# EAGLE board schematics1 (EAGLE 6.1)
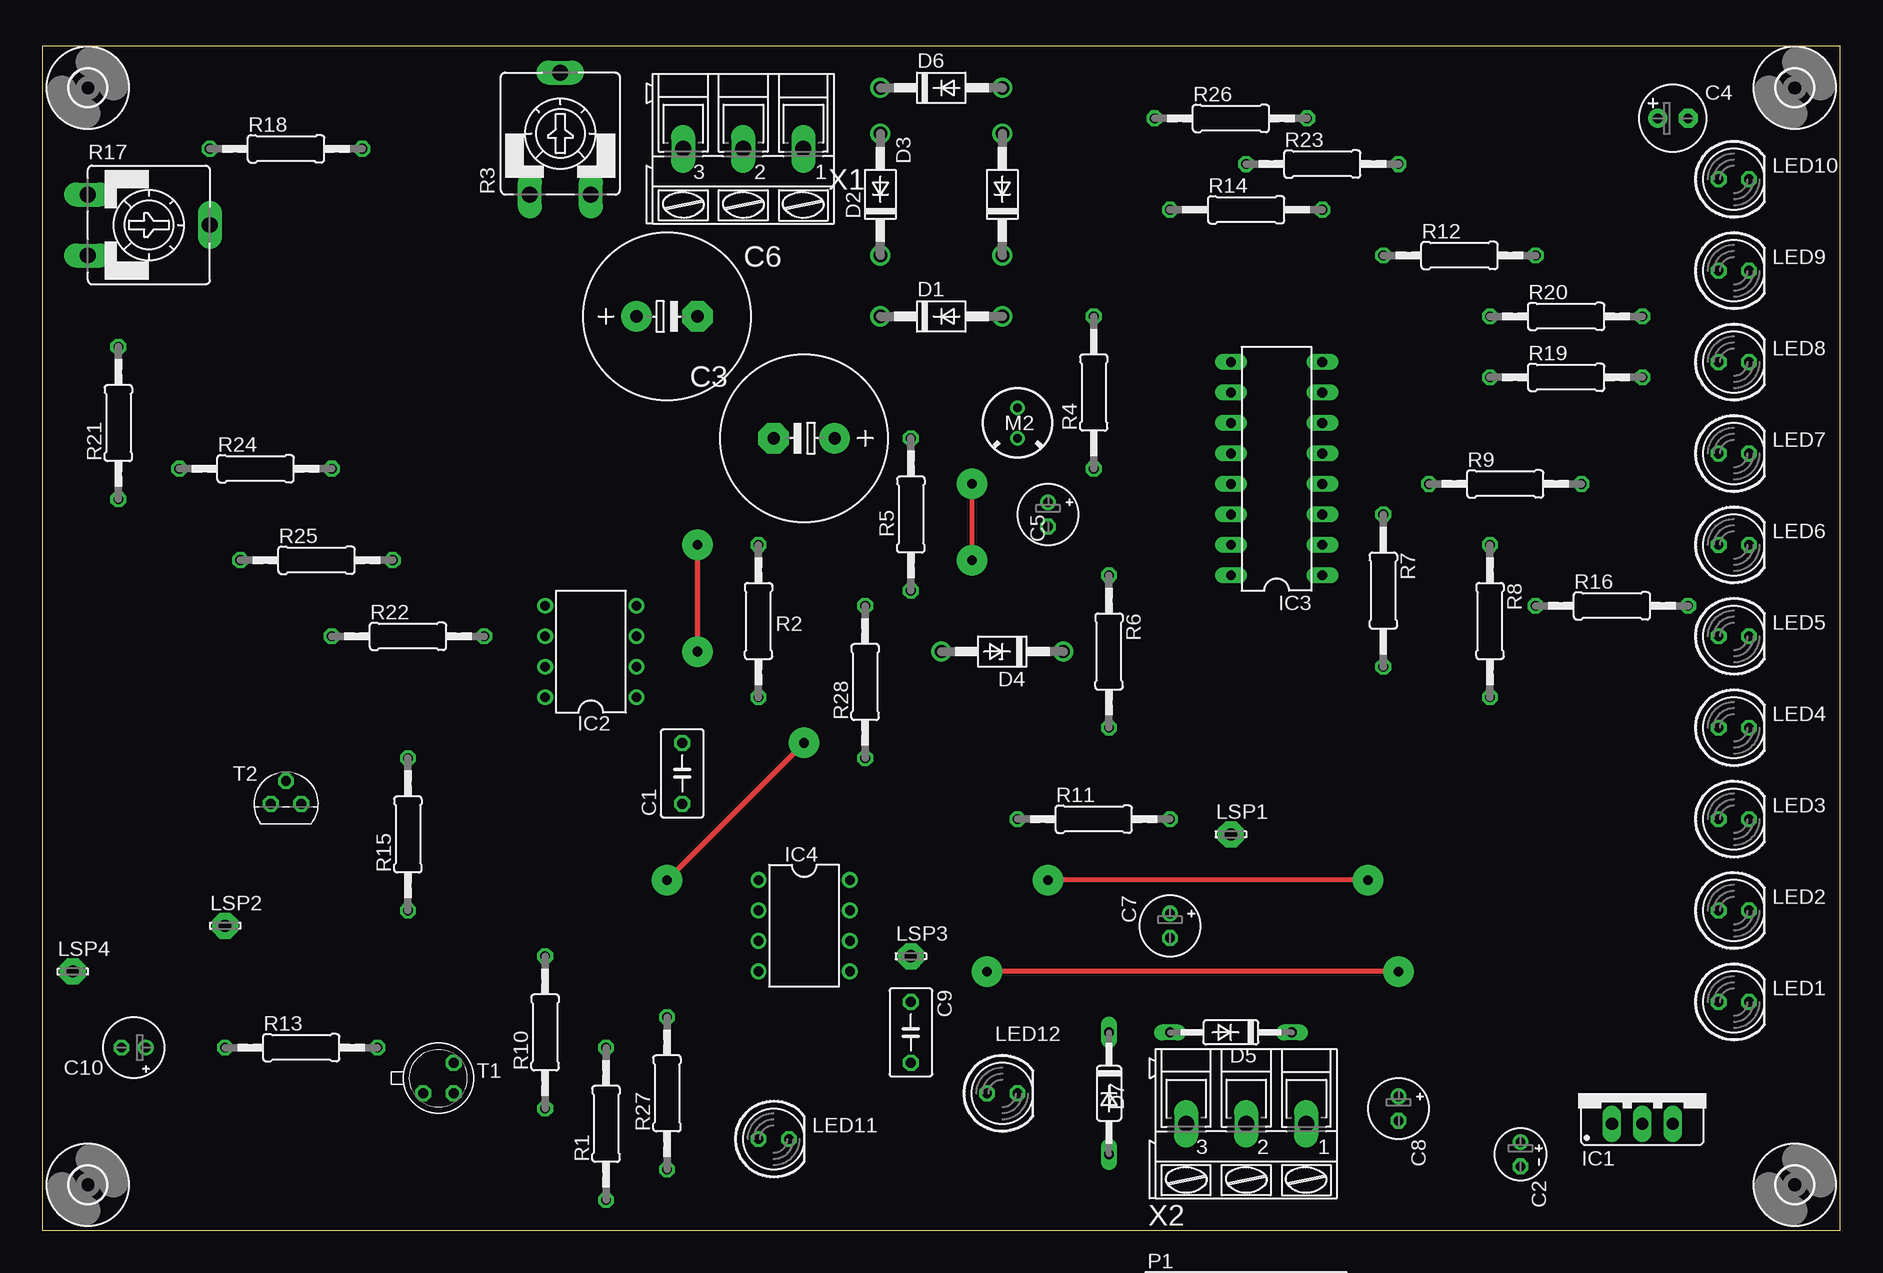
[diagram p0: board, top side]
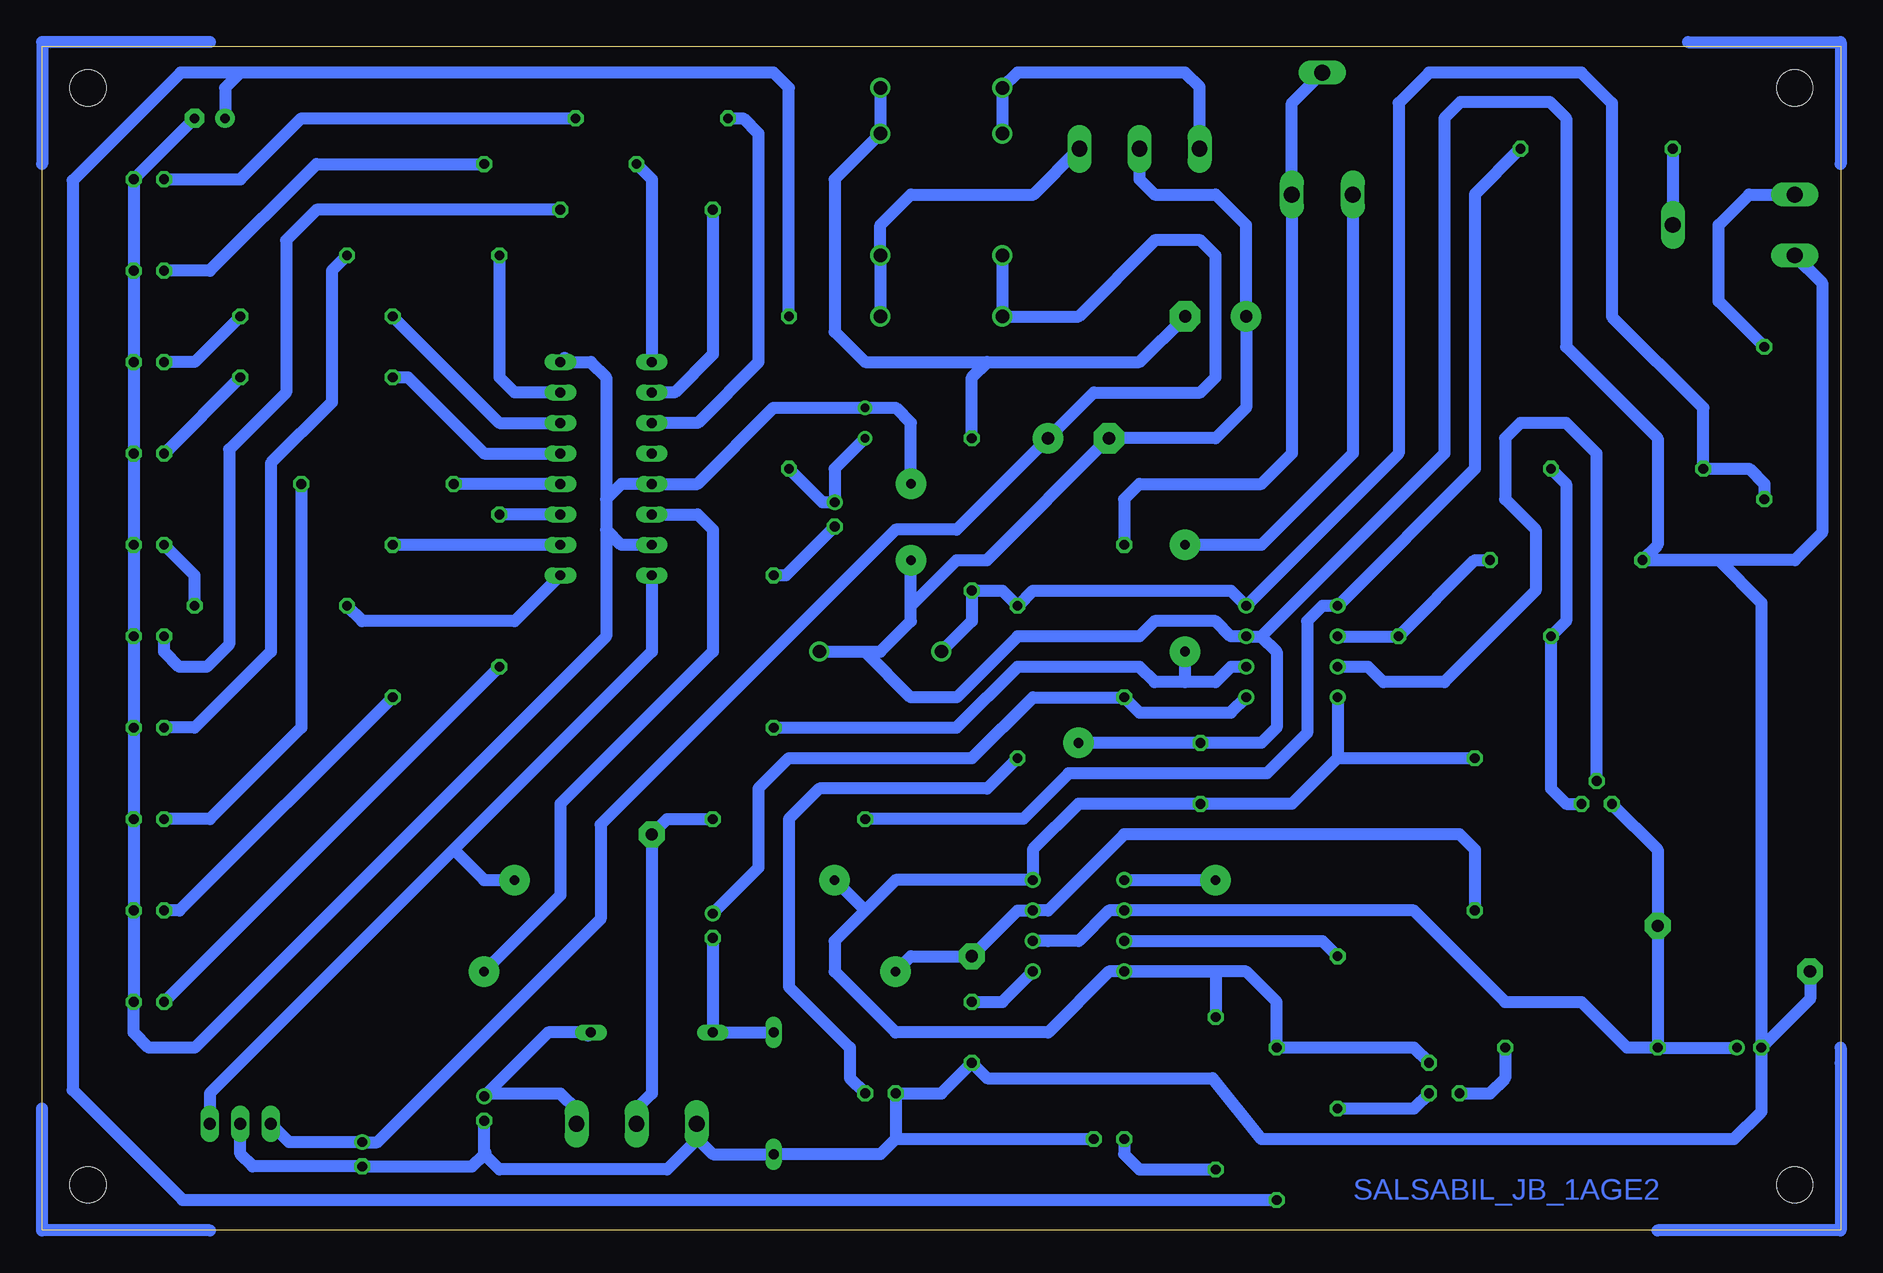
[diagram p1: board, bottom side, seen from below]

Size 149.84 x 98.73 mm. Coordinates in mm from the lower left corner, seen from the top.
Outline: 0,0 149.84,0 149.84,98.73 0,98.73 0,0
Copper layers (1*16): Top 0.035mm / dielectric 1.5mm / Bottom 0.035mm
Design rules: minimum track width 10mil, minimum drill 24mil, track to track 8mil, track to pad 8mil, pad to pad 8mil, via to via 8mil, smd to smd 8mil, copper to edge 40mil, drill to drill 8mil, minimum pad ring 10mil, minimum via ring 8mil, stop-mask expansion 4mil, vias tented up to drill 0mil, thermal gap 10mil

## Footprints (pad centres in the part's own frame; a part is rotated, then mirrored left to right if it is on the bottom)
C050-035X075 = drill 0.813 octagon: 1 -2.54,0; 2 2.54,0
E2-4 = drill 0.813 pad 1.27: + -1.016,0 | drill 0.813 pad 1.27 octagon: - 1.016,0
E5-13 = drill 1.016 pad 2.54: + -2.54,0 | drill 1.016 pad 2.54 octagon: - 2.54,0
E2,5-6 = drill 0.813 pad 1.6: + -1.27,0 | drill 0.813 pad 1.6 octagon: - 1.27,0
E2-5 = drill 0.813 pad 1.27: + -1.016,0 | drill 0.813 pad 1.27 octagon: - 1.016,0
DO41-10 = drill 1.118: A 5.08,0; C -5.08,0
DO41Z10 = drill 1.118: A 5.08,0; C -5.08,0
DO35-10 = drill 0.813 long: A 5.08,0; C -5.08,0
78XXS = drill 1.016 long: GND 0,-2.54; IN -2.54,-2.54; OUT 2.54,-2.54
DIL08 = drill 0.813 pad 1.27: 1 -3.81,-3.81; 2 -1.27,-3.81; 3 1.27,-3.81; 4 3.81,-3.81; 5 3.81,3.81; 6 1.27,3.81; 7 -1.27,3.81; 8 -3.81,3.81
DIL16 = drill 0.813 long: 1 -8.89,-3.81; 2 -6.35,-3.81; 3 -3.81,-3.81; 4 -1.27,-3.81; 5 1.27,-3.81; 6 3.81,-3.81; 7 6.35,-3.81; 8 8.89,-3.81; 9 8.89,3.81; 10 6.35,3.81; 11 3.81,3.81; 12 1.27,3.81; 13 -1.27,3.81; 14 -3.81,3.81; 15 -6.35,3.81; 16 -8.89,3.81
LED5MM = drill 0.813 octagon: A -1.27,0; K 1.27,0
LSP10 = drill 1.016 pad 2.159 octagon: MP 0,0
F6050AP = drill 0.7 pad 1.2: 1 0,1.27; 2 0,-1.27
3RP/1610N = drill 1.2 pad 2.184: 1 -5,0; 2 0,0; 3 5,0
0207/12 = drill 0.813 octagon: 1 -6.35,0; 2 6.35,0
CA9V = drill 1.321 long: A -2.54,-5.08; E 2.54,-5.08; S 0,5.08
TO18 = drill 0.813 octagon: 1 -1.27,-1.27; 2 1.27,-1.27; 3 1.27,1.27
TO92 = drill 0.813 octagon: 1 1.27,0; 2 0,1.905; 3 -1.27,0
3,0 = hole 3: 0,0
AK300/3 = drill 1.321 long: 1 -5.004,0; 2 0,0; 3 5.004,0

## Placement (x,y rotation side)
C1  100n  [C050-035X075]  53.34,38.1 90 top
C2  1µ  [E2-4]  123.19,6.35 270 top
C3  1000µ  [E5-13]  63.5,66.04 180 top
C4  100µ  [E2,5-6]  135.89,92.71 0 top
C5  10µ  [E2-5]  83.82,59.69 270 top
C6  1000µ  [E5-13]  52.07,76.2 0 top
C7  10µ  [E2-5]  93.98,25.4 270 top
C8  2.2µ  [E2-5]  113.03,10.16 270 top
C9  10n  [C050-035X075]  72.39,16.51 270 top
C10  10µ  [E2-5]  7.62,15.24 180 top
D1  1N4004  [DO41-10]  74.93,76.2 0 top
D2  1N4004  [DO41-10]  69.85,86.36 90 top
D3  1N4004  [DO41-10]  80.01,86.36 90 top
D4  BZX85  [DO41Z10]  80.01,48.26 180 top
D5  1N4148DO35-10  [DO35-10]  99.06,16.51 180 top
D6  1N4004  [DO41-10]  74.93,95.25 0 top
D7  1N4148DO35-10  [DO35-10]  88.9,11.43 270 top
IC1  [78XXS]  133.35,11.43 0 top
IC2  LM358N  [DIL08]  45.72,48.26 90 top
IC3  4017N  [DIL16]  102.87,63.5 90 top
IC4  NE555N  [DIL08]  63.5,25.4 270 top
LED1  R  [LED5MM]  140.97,19.05 0 top
LED2  J  [LED5MM]  140.97,26.67 0 top
LED3  V  [LED5MM]  140.97,34.29 0 top
LED4  B  [LED5MM]  140.97,41.91 0 top
LED5  R  [LED5MM]  140.97,49.53 0 top
LED6  J  [LED5MM]  140.97,57.15 0 top
LED7  V  [LED5MM]  140.97,64.77 0 top
LED8  B  [LED5MM]  140.97,72.39 0 top
LED9  R  [LED5MM]  140.97,80.01 0 top
LED10  J  [LED5MM]  140.97,87.63 0 top
LED11  V  [LED5MM]  60.96,7.62 0 top
LED12  V  [LED5MM]  80.01,11.43 0 top
LSP1  LSP10  [LSP10]  99.06,33.02 0 top
LSP2  LSP10  [LSP10]  15.24,25.4 0 top
LSP3  LSP10  [LSP10]  72.39,22.86 0 top
LSP4  LSP10  [LSP10]  2.54,21.59 0 top
M2  ELECTRET_MICROPHON-F6050AP  [F6050AP]  81.28,67.31 0 top
P1  10K  [3RP/1610N]  100.33,-8.89 0 top  (outside the outline)
R1  4K7  [0207/12]  46.99,8.89 90 top
R2  47K  [0207/12]  59.69,50.8 270 top
R3  1M  [CA9V]  43.18,91.44 0 top
R4  2K2  [0207/12]  87.63,69.85 90 top
R5  150  [0207/12]  72.39,59.69 90 top
R6  1K  [0207/12]  88.9,48.26 270 top
R7  1K  [0207/12]  111.76,53.34 270 top
R8  1K  [0207/12]  120.65,50.8 270 top
R9  1K  [0207/12]  121.92,62.23 0 top
R10  1K  [0207/12]  41.91,16.51 90 top
R11  470K  [0207/12]  87.63,34.29 0 top
R12  1K  [0207/12]  118.11,81.28 0 top
R13  15  [0207/12]  21.59,15.24 0 top
R14  1K  [0207/12]  100.33,85.09 0 top
R15  10K  [0207/12]  30.48,33.02 90 top
R16  1K  [0207/12]  130.81,52.07 0 top
R17  10K  [CA9V]  8.89,83.82 270 top
R18  470K  [0207/12]  20.32,90.17 0 top
R19  1K  [0207/12]  127,71.12 0 top
R20  1K  [0207/12]  127,76.2 0 top
R21  2K2  [0207/12]  6.35,67.31 90 top
R22  470K  [0207/12]  30.48,49.53 0 top
R23  1K  [0207/12]  106.68,88.9 0 top
R24  33K  [0207/12]  17.78,63.5 0 top
R25  470K  [0207/12]  22.86,55.88 0 top
R26  1K  [0207/12]  99.06,92.71 0 top
R27  1K  [0207/12]  52.07,11.43 90 top
R28  1K  [0207/12]  68.58,45.72 90 top
T1  2N2222  [TO18]  33.02,12.7 0 top
T2  BC547  [TO92]  20.32,35.56 0 top
U$1  [3,0]  3.81,95.25 0 top
U$2  [3,0]  146.05,95.25 0 top
U$3  [3,0]  146.05,3.81 0 top
U$4  [3,0]  3.81,3.81 0 top
X1  [AK300/3]  58.42,90.17 180 top
X2  [AK300/3]  100.33,8.89 180 top

## Library data of the parts
C1-C10 R1 R2 R4-R16 R18-R28 = rcl
D1-D7 = diode
IC1 = v-reg
IC2 IC4 = linear
IC3 = 40xx
LED1-LED12 = led
LSP1-LSP4 = solpad
M2 = microphon
P1 R3 R17 = pot
T1 T2 = transistor
U$1-U$4 = holes
X1 X2 = con-ptr500; OC_FARNELL: unknown; OC_NEWARK: unknown

## Nets
+12V: C1.1 IC1.OUT IC2.8 IC3.16 IC4.4 IC4.8 R1.2 R15.2 R27.2 T1.3
-12V: D4.A IC2.4 R5.1 R21.1 R24.1 R28.2
GND: C1.2 C2.- C3.- C4.- C6.+ C8.- C9.2 C10.- D4.C D7.A IC1.GND IC2.3 IC3.8 IC3.13 IC3.15 IC4.1 LED1.K LED2.K LED3.K LED4.K LED5.K LED6.K LED7.K LED8.K LED9.K LED10.K LED11.K LED12.A LSP4.MP M2.1 R17.E R25.1 X1.2 X2.3
N$1: LED1.A R7.2
N$2: LED2.A R8.2
N$3: LED3.A R9.2
N$4: LED4.A R12.2
N$5: LED5.A R14.2
N$6: LED6.A R16.2
N$7: LED7.A R19.2
N$8: LED8.A R20.2
N$9: LED9.A R23.2
N$10: LED10.A R26.2
N$11: IC3.3 R7.1
N$12: IC3.2 R8.1
N$13: IC3.4 R9.1
N$14: IC3.7 R12.1
N$15: IC3.10 R14.1
N$16: IC3.1 R16.1
N$17: IC3.5 R19.1
N$18: IC3.6 R20.1
N$19: IC3.9 R23.1
N$20: IC3.11 R26.1
N$21: LSP1.MP R11.2 X2.2
N$22: IC2.5 R11.1 R18.2
N$23: R17.A R21.2
N$24: IC2.6 R22.2 R25.2
N$25: R22.1 R24.2 T2.1
N$26: C5.+ M2.2 R4.1
N$27: C4.+ R1.1 R4.2
N$28: C5.- R6.1
N$29: IC2.2 R3.A R6.2
N$30: R2.1 R3.E R3.S
N$31: C7.+ IC2.1 R2.2
N$32: C8.+ D5.C X2.1
N$33: P1.3
N$34: C7.- D5.A D7.C
N$35: P1.2
N$36: P1.1
N$37: IC2.7 T2.2
N$38: R17.S R18.1
N$39: C10.+ IC4.2 IC4.6 LSP2.MP R13.1 T2.3
N$40: C9.1 IC4.5
N$41: R13.2 T1.1
N$42: R10.1 T1.2
N$43: IC4.3 R10.2
N$44: IC3.14 IC4.7 LSP3.MP R15.1
N$45: D1.A D3.C X1.1
N$46: D2.A D6.C X1.3
N$47: LED11.A R27.1
N$48: C2.+ C3.+ D1.C D2.C IC1.IN
N$49: C6.- D3.A D6.A R5.2
N$50: LED12.K R28.1

## Tracks (layer width: path | path; a pad name or v marks a point on that pad's centre or on a via)
+12V  (via drill 0.8 pad 2.54)
  Top 0.406: v110.49,29.21 v83.82,29.21
  Bottom 1.016: T1.3 35.56,15.24 R1.2 46.99,19.05 49.53,21.59 IC4.4 | 41.91,39.37 R15.2 | IC2.8 41.91,39.37 | 41.91,39.37 45.72,35.56 C1.1 63.5,35.56 67.31,31.75 IC4.8 78.74,29.21 81.28,26.67 | IC4.4 52.07,21.59 R27.2 | IC4.4 60.96,21.59 66.04,16.51 78.74,16.51 83.82,21.59 83.82,24.13 81.28,26.67 | IC1.OUT 135.89,11.43 115.57,31.75 | IC3.16 99.06,48.26 115.57,31.75 | 115.57,31.75 113.03,29.21 v110.49,29.21 | v83.82,29.21 81.28,26.67
-12V
  Bottom 1.016: D4.A 72.39,50.8 R5.1 69.85,53.34 R28.2 67.31,53.34 50.8,53.34 IC2.4 36.83,64.77 36.83,93.98 34.29,96.52 21.59,96.52 19.05,93.98 19.05,76.2 11.43,68.58 R24.1 7.62,63.5 6.35,62.23 R21.1
GND  (via drill 0.8 pad 2.54)
  Top 0.406: v63.5,40.64 v52.07,29.21 | v77.47,62.23 v77.47,55.88
  Bottom 1.016: R25.1 10.16,55.88 6.6,52.32 C10.- | LSP4.MP 2.54,19.3 C10.- | C8.- 113.03,6.6 112.9,6.48 113.03,6.35 | C10.- 6.6,9.91 8.89,7.62 48.26,7.62 52.32,12.7 71.12,12.7 C9.2 74.93,11.43 LED12.A 78.74,7.62 | 113.03,6.35 114.05,5.33 C2.- 132.33,5.33 133.35,6.35 IC1.GND | 113.03,6.35 111.76,5.08 97.79,5.08 95.33,7.54 X2.3 95.33,7.7 93.98,6.35 D7.A 80.01,6.35 78.74,7.62 | 78.74,7.62 LED11.K | v63.5,40.64 C1.2 48.26,40.64 46.99,41.91 46.99,48.26 48.26,49.53 | R25.1 3.81,55.88 1.52,58.17 1.52,78.99 R17.E | X1.2 58.42,87.63 57.15,86.36 52.07,86.36 49.53,83.82 C6.+ 49.53,68.58 52.07,66.04 C3.- 71.12,55.88 73.66,55.88 77.47,52.07 | R25.1 15.24,57.15 15.24,66.04 22.86,73.66 22.86,92.71 24.23,94.08 31.65,94.08 33.02,92.71 33.02,64.77 48.26,49.53 | D4.C 81.28,48.26 | 81.28,48.26 80.01,48.26 77.47,50.8 77.47,52.07 | 81.28,48.26 77.47,44.45 73.66,44.45 68.58,49.53 58.42,49.53 57.15,50.8 52.07,50.8 50.8,49.53 IC2.3 48.26,49.53 | IC4.1 v52.07,29.21 | C4.- LED10.K LED9.K LED8.K LED7.K LED6.K LED5.K LED4.K LED3.K LED2.K LED1.K 142.24,16.51 140.97,15.24 137.16,15.24 102.87,49.53 102.87,58.42 | 100.33,57.15 IC3.15 101.6,57.15 102.87,58.42 | 106.34,72.72 IC3.8 104.14,72.39 102.87,71.12 102.87,60.96 | 102.87,60.96 102.87,58.42 | 102.87,60.96 101.6,62.23 IC3.13 95.25,62.23 88.9,68.58 M2.1 78.74,68.58 77.47,67.31 v77.47,62.23 | 77.47,52.07 v77.47,55.88
N$1
  Bottom 1.016: R7.2 LED1.A
N$2
  Bottom 1.016: R8.2 138.43,26.67 LED2.A
N$3
  Bottom 1.016: LED3.A 135.89,34.29 128.27,41.91 R9.2
N$4
  Bottom 1.016: LED4.A 137.16,41.91 130.81,48.26 130.81,63.95 125.73,69.03 125.73,80.01 R12.2
N$5
  Bottom 1.016: LED5.A 139.7,48.26 138.43,46.99 136.16,46.99 134.28,48.87 134.28,65.11 129.54,69.85 129.54,82.55 127,85.09 R14.2
N$6
  Bottom 1.016: LED6.A 137.16,54.61 R16.2
N$7
  Bottom 1.016: R19.2 LED7.A
N$8
  Bottom 1.016: R20.2 137.16,72.39 LED8.A
N$9
  Bottom 1.016: R23.2 127,88.9 135.89,80.01 LED9.A
N$10
  Bottom 1.016: LED10.A 133.35,87.63 128.27,92.71 R26.2
N$11
  Bottom 1.016: IC3.3 R7.1
N$12
  Bottom 1.016: IC3.2 R8.1
N$13
  Bottom 1.016: IC3.4 R9.1
N$14
  Bottom 1.016: IC3.7 110.49,69.85 111.76,71.12 R12.1
N$15
  Bottom 1.016: IC3.10 97.17,69.85 93.98,73.04 R14.1
N$16
  Bottom 1.016: IC3.1 110.49,50.8 123.19,50.8 R16.1
N$17
  Bottom 1.016: IC3.5 113.03,64.77 119.38,71.12 R19.1
N$18
  Bottom 1.016: R20.1 111.76,67.31 IC3.6
N$19
  Bottom 1.016: R23.1 99.06,87.63 IC3.9
N$20
  Bottom 1.016: R26.1 91.44,92.71 90.17,91.44 90.17,72.39 95.25,67.31 IC3.11
N$21
  Bottom 1.016: R11.2 97.79,34.29 LSP1.MP 99.06,11.43 100.33,10.16 X2.2
N$22
  Bottom 1.016: R18.2 30.48,86.36 30.48,63.5 IC2.5 43.18,52.07 44.45,50.8 44.45,41.46 47.81,38.1 64.32,38.1 68.08,34.34 81.23,34.34 R11.1
N$23
  Bottom 1.016: R21.2 10.16,77.47 10.16,83.82 7.62,86.36 R17.A
N$24
  Bottom 1.016: R25.2 30.48,55.88 R22.2 IC2.6
N$25
  Bottom 1.016: R24.2 22.86,62.23 22.86,50.8 R22.1 24.13,36.83 22.86,35.56 T2.1
N$26
  Bottom 1.016: R4.1 84.84,60.71 C5.+ 83.82,63.5 M2.2
N$27
  Bottom 1.016: R1.1 138.16,2.54 147.32,11.7 147.32,87.51 138.31,96.52 133.35,96.52 | 133.35,96.52 88.9,96.52 87.63,95.25 R4.2 | 133.35,96.52 134.62,95.25 C4.+
N$28
  Bottom 1.016: C5.- 87.88,54.61 R6.1
N$29  (via drill 0.8 pad 2.54)
  Top 0.406: v54.61,48.26 v54.61,57.15
  Bottom 1.016: R6.2 73.66,41.91 68.58,46.99 58.42,46.99 57.15,45.72 54.61,45.72 | R3.A 40.64,64.77 48.26,57.15 v54.61,57.15 | IC2.2 50.8,46.99 52.07,45.72 54.61,45.72 | 54.61,45.72 v54.61,48.26
N$30
  Bottom 1.016: R3.S 45.72,93.98 R3.E 45.72,64.77 48.26,62.23 58.42,62.23 59.69,60.96 R2.1
N$31
  Bottom 1.016: C7.+ 90.17,30.23 90.17,36.83 87.63,39.37 72.39,39.37 67.31,44.45 R2.2 58.42,43.18 50.8,43.18 IC2.1
N$32
  Bottom 1.016: 104.39,16.26 D5.C 107.7,16.51 C8.+ 112.78,11.43 106.68,11.43 105.33,10.08 X2.1
N$34
  Bottom 1.016: D7.C D5.A C7.-
N$37
  Bottom 1.016: IC2.7 39.37,46.99 38.1,45.72 33.02,45.72 25.4,53.34 25.4,58.42 27.94,60.96 27.94,66.04 26.67,67.31 22.86,67.31 20.32,64.77 T2.2
N$38
  Bottom 1.016: R18.1 R17.S
N$39
  Bottom 1.016: 66.04,24.13 IC4.6 63.5,24.13 60.96,26.67 IC4.2 35.56,26.67 27.94,19.05 21.59,19.05 17.78,15.24 R13.1 | R13.1 C10.+ | R13.1 LSP2.MP 15.24,31.75 T2.3
N$40
  Bottom 1.016: C9.1 69.85,19.05 IC4.5
N$41
  Bottom 1.016: T1.1 29.21,11.43 27.94,12.7 R13.2
N$42
  Bottom 1.016: R10.1 35.56,10.16 T1.2
N$43
  Bottom 1.016: IC4.3 43.18,24.13 R10.2
N$44  (via drill 0.8 pad 2.54)
  Top 0.406: v113.03,21.59 v78.74,21.59
  Bottom 1.016: IC3.14 95.25,59.69 93.98,58.42 93.98,48.26 106.68,35.56 106.68,27.94 v113.03,21.59 | v78.74,21.59 77.47,22.86 LSP3.MP 68.58,26.67 IC4.7 66.04,26.67 59.69,33.02 31.75,33.02 30.48,31.75 R15.1
N$45
  Bottom 1.016: D1.A D3.C 80.01,83.82 77.47,86.36 67.23,86.36 X1.1
N$46
  Bottom 1.016: D2.A D6.C 68.58,96.52 54.61,96.52 53.42,95.33 X1.3
N$47
  Bottom 1.016: LED11.A 59.69,6.35 58.42,5.08 R27.1
N$48
  Bottom 1.016: D2.C D1.C 63.5,76.2 57.15,82.55 53.34,82.55 52.07,81.28 52.07,71.12 53.34,69.85 62.23,69.85 C3.+ 73.66,58.42 78.74,58.42 103.33,33.83 103.33,25.96 121.92,7.37 C2.+ 129.29,7.37 IC1.IN
N$49
  Bottom 1.016: D6.A D3.A 83.82,87.63 83.82,74.93 81.28,72.39 71.12,72.39 | C6.- 58.42,72.39 71.12,72.39 | 71.12,72.39 72.39,71.12 R5.2
N$50
  Bottom 1.016: LED12.K 82.55,12.7 82.55,15.24 87.63,20.32 87.63,34.29 85.09,36.83 71.12,36.83 R28.1
S$1
  Bottom 1.016: 12.7,99.06 0,99.06 0,88.9
S$2
  Bottom 1.016: 0,15.24 0,13.97 0,0 15.24,0
S$3
  Bottom 1.016: 149.86,10.16 149.86,0 135.89,0
S$4
  Bottom 1.016: 135.89,99.06 149.86,99.06 149.86,88.9
S$5  (via drill 0.8 pad 2.54)
  other vias: 3.81,95.25
S$7  (via drill 0.8 pad 2.54)
  other vias: 146.05,3.81
S$8  (via drill 0.8 pad 2.54)
  other vias: 3.81,3.81
S$9  (via drill 0.8 pad 2.54)
  other vias: 146.05,95.25

## Text on the board
Bottom: SALSABIL_JB_1AGE2